# Altium PCB G-键盘板-V1.4.PcbDoc
Units mil, origin at the board's own origin, x right, y up, seen from the top; angles counter-clockwise.
Board outline 3543.31 x 4251.97 mil, 2 copper layers (Top Layer, Bottom Layer); 21 components, 10 nets, 74 pads, 6 vias.
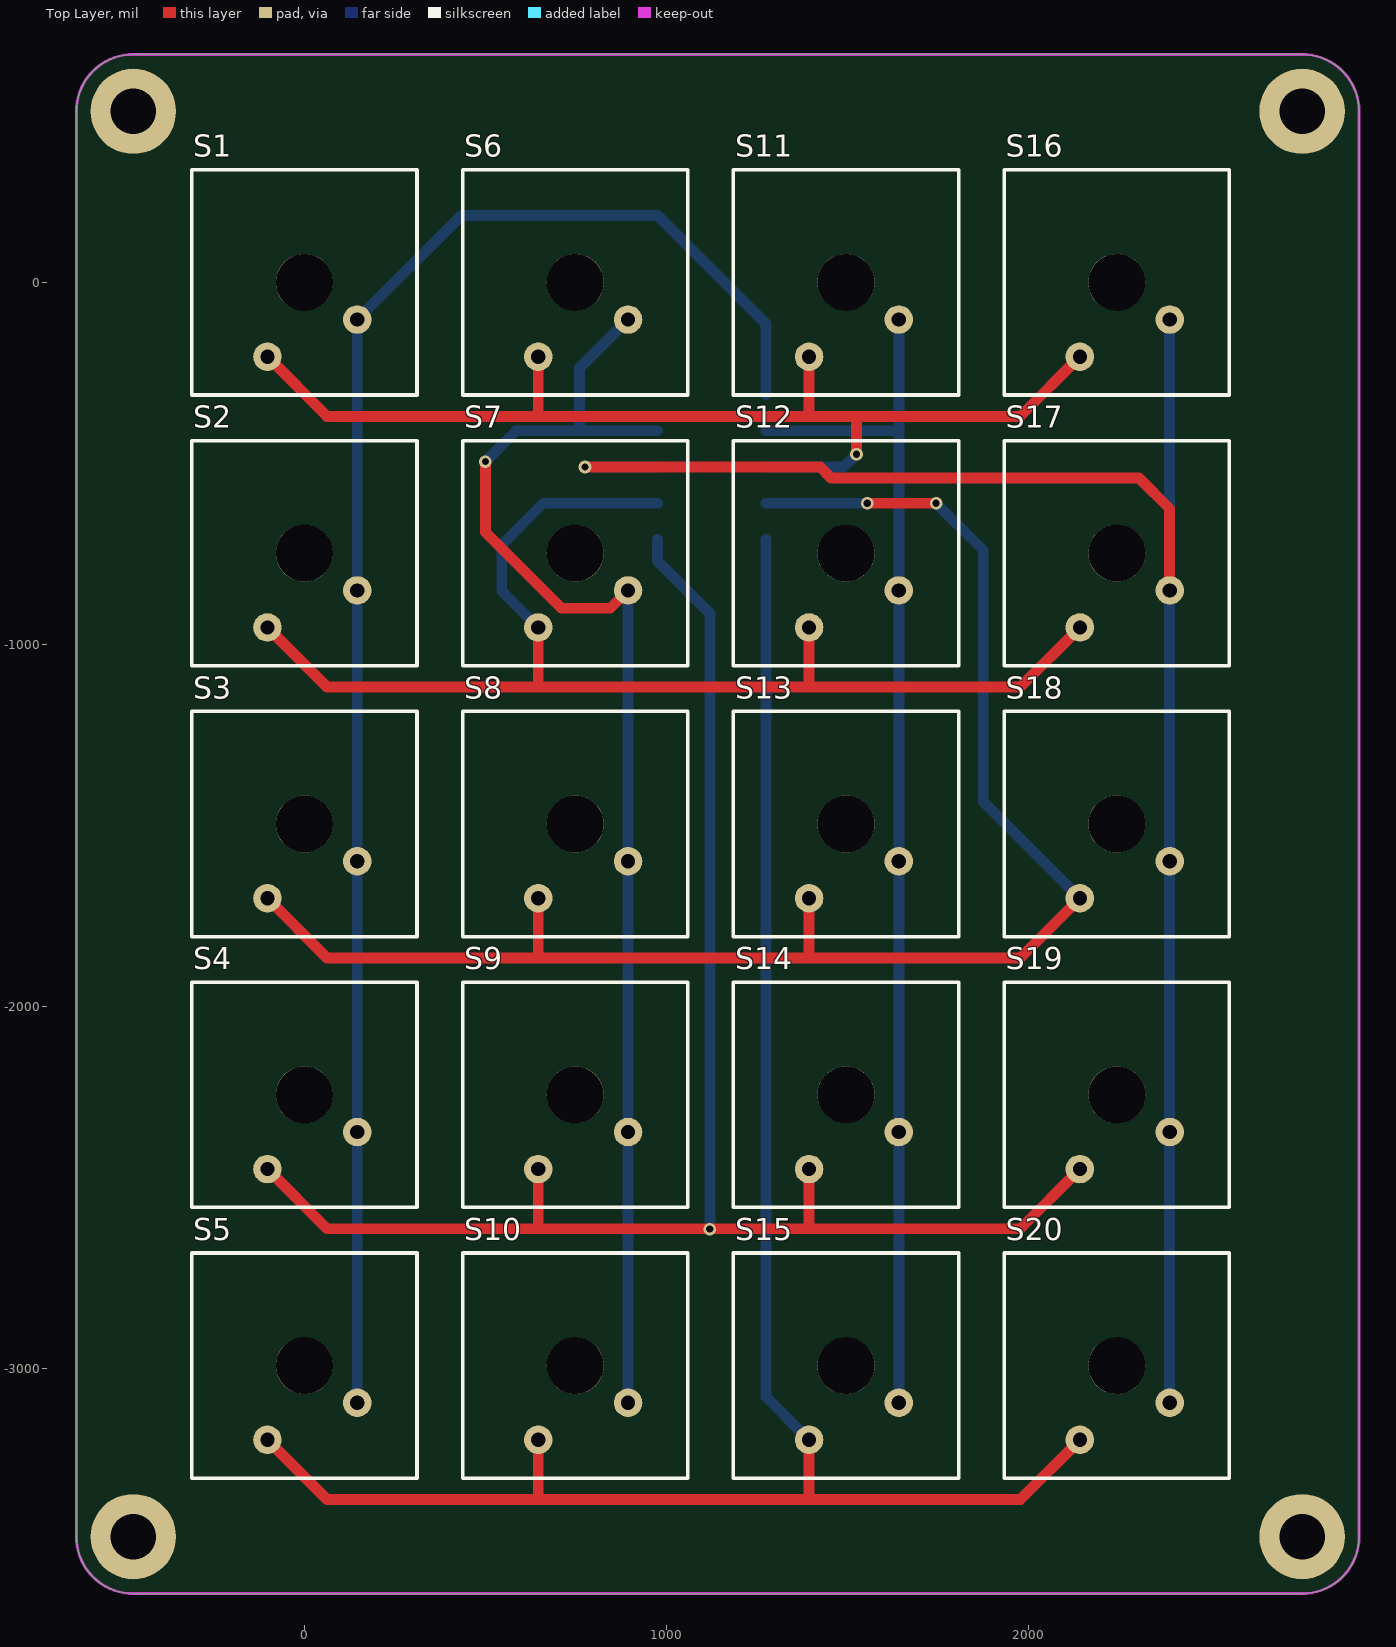
[diagram p0: Top Layer view]
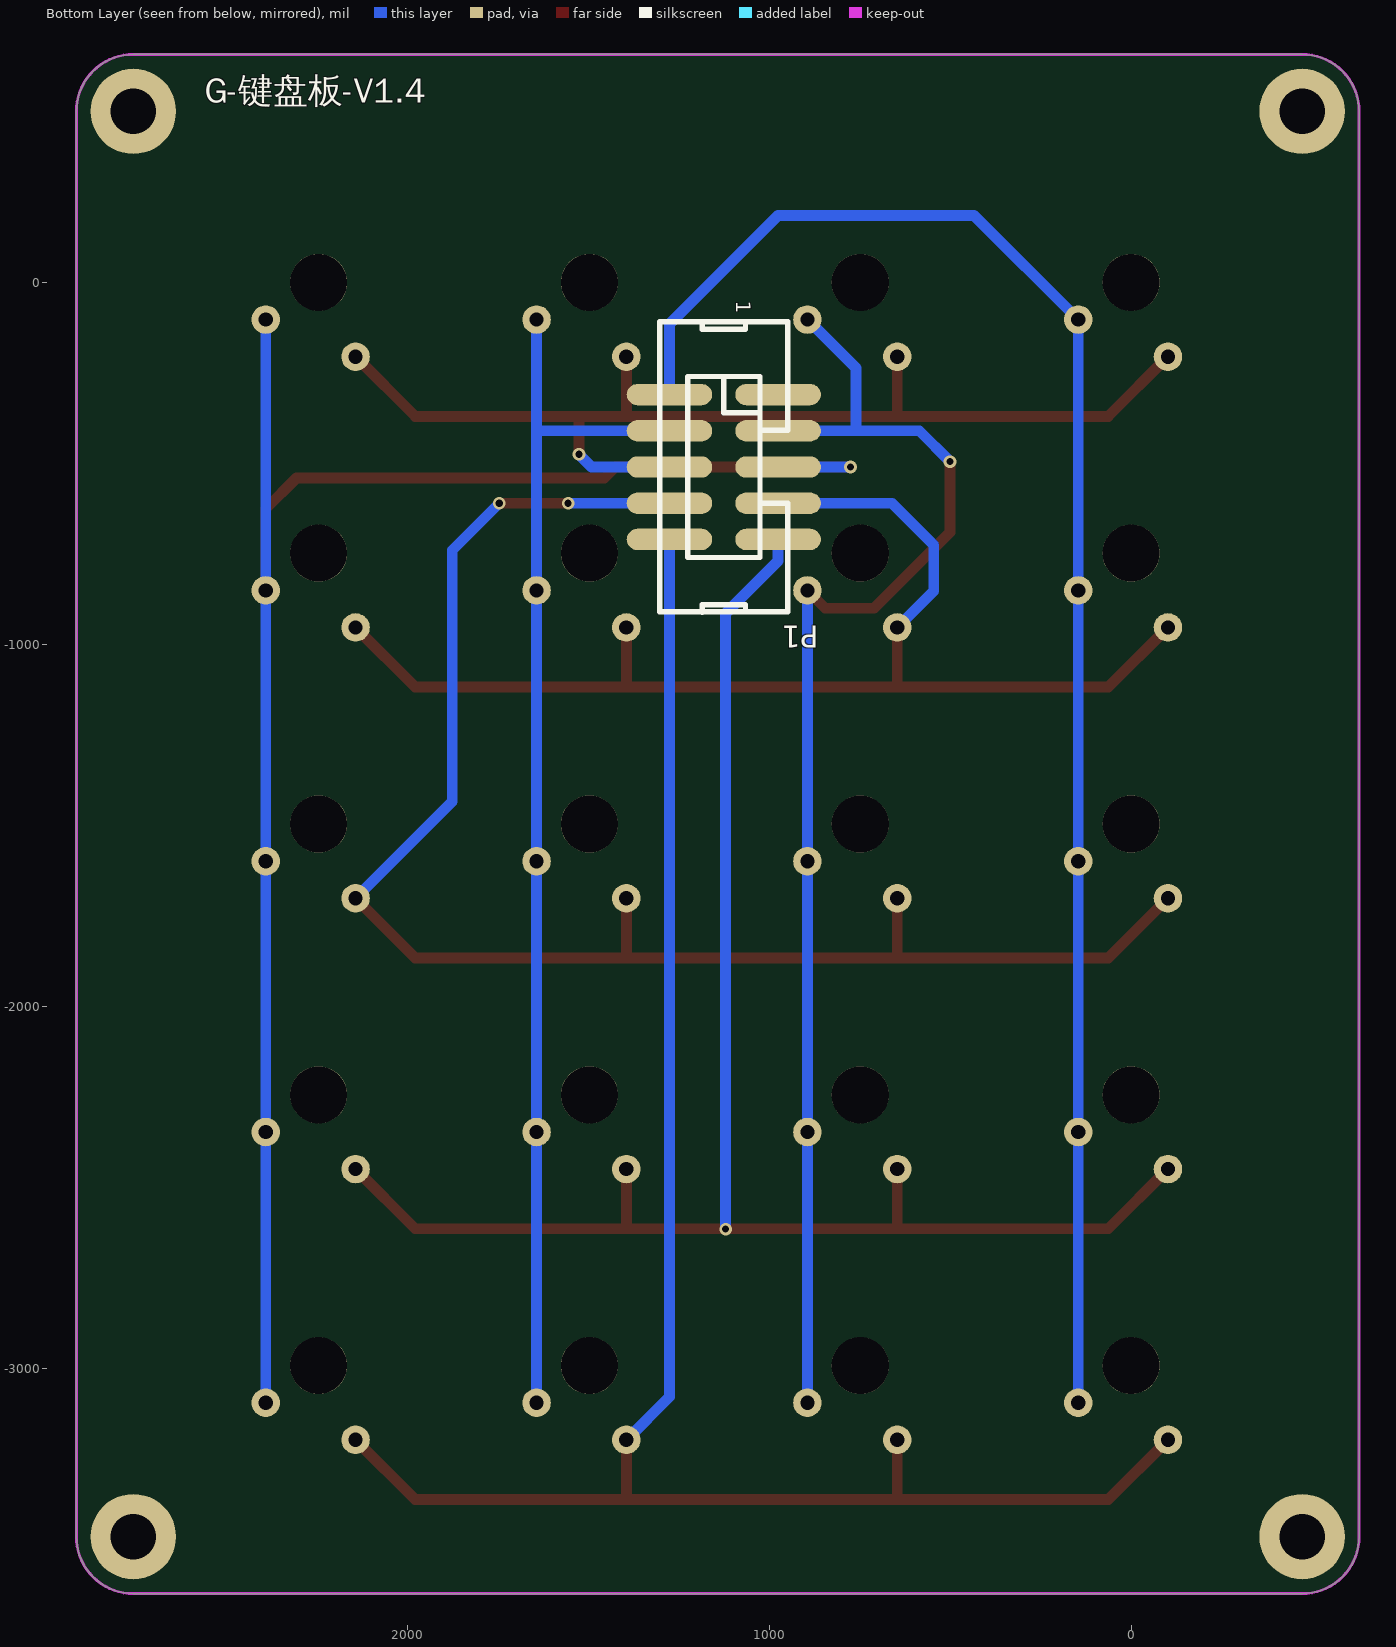
[diagram p1: Bottom Layer view, seen from below]

## Layer stack, top to bottom
Top Solder: solder mask 0.4, Solder Resist, Dk 3.5
Top Layer: signal copper 1.4
Dielectric 1: dielectric 12.6, FR-4, Dk 4.8
Bottom Layer: signal copper 1.4
Bottom Solder: solder mask 0.4, Solder Resist, Dk 3.5

## Board outline
-629.92,-3464.57 ccw(c-472.44,-3464.57) -472.44,-3622.05 2755.91,-3622.05 ccw(c2755.91,-3464.57) 2913.39,-3464.57 2913.39,472.44 ccw(c2755.91,472.44) 2755.91,629.92 -472.44,629.92 ccw(c-472.44,472.44) -629.92,472.44

## Design rules (kind name [scope] priority, off if disabled: settings)
Clearance [All] p1: gap=8 except(15: Arc-Poly Track-Poly SMDPad-Poly THPad-Poly Via-Poly Fill-Poly Poly-Poly)
PolygonConnect via [isvia] p1: connectstyle=Direct reliefconductorwidth=10 reliefentries=4 polygonreliefangle="90 Angle" airgapwidth=10
PolygonConnect [All] p2: connectstyle=Relief reliefconductorwidth=10 reliefentries=4 polygonreliefangle="90 Angle" airgapwidth=10
RoutingVias [All] p1: holewidth=11.81 width=23.62 viastyle="Through Hole" minholewidth=11.81 minwidth=23.62 maxholewidth=39.37 maxwidth=78.74
SolderMaskExpansion [All] p1: expansion=4
Width [All] p1: maxlimit=100 minlimit=10 preferedwidth=10
30 further rules are at their usual default settings.

## Components (designator, comment, footprint, x,y, rotation, side; value= is the part's Value field where it differs from the comment)
P1 "简易牛角座-10P" IDC2.54-SMD-10P 1075,-310 r270 bottom
S1 "BUTTON2" KEY 0,0 r0 top
S2 "BUTTON2" KEY 0,-748.03 r0 top
S3 "BUTTON2" KEY 0,-1496.06 r0 top
S4 "BUTTON2" KEY 0,-2244.09 r0 top
S5 "BUTTON2" KEY 0,-2992.13 r0 top
S6 "BUTTON2" KEY 748.03,0 r0 top
S7 "BUTTON2" KEY 748.03,-748.03 r0 top
S8 "BUTTON2" KEY 748.03,-1496.06 r0 top
S9 "BUTTON2" KEY 748.03,-2244.09 r0 top
S10 "BUTTON2" KEY 748.03,-2992.13 r0 top
S11 "BUTTON2" KEY 1496.06,0 r0 top
S12 "BUTTON2" KEY 1496.06,-748.03 r0 top
S13 "BUTTON2" KEY 1496.06,-1496.06 r0 top
S14 "BUTTON2" KEY 1496.06,-2244.09 r0 top
S15 "BUTTON2" KEY 1496.06,-2992.13 r0 top
S16 "BUTTON2" KEY 2244.09,0 r0 top
S17 "BUTTON2" KEY 2244.09,-748.03 r0 top
S18 "BUTTON2" KEY 2244.09,-1496.06 r0 top
S19 "BUTTON2" KEY 2244.09,-2244.09 r0 top
S20 "BUTTON2" KEY 2244.09,-2992.13 r0 top

## Footprints (in the part's own frame and the unit in brackets; to place one, negate y for a bottom-side part, rotate by r counter-clockwise, add the part's x,y. Pads: shape width x height; smd on the part's side, far side on the other; paste and mask are expansions set on the pad)
IDC2.54-SMD-10P [mm] "34P简易牛角座"
  oval 1.5x6 smd: 1(0,2.54) 2(0,-5.08) 3(2.54,2.54) 4(2.54,-5.08) 5(5.08,2.54) 6(5.08,-5.08) 7(7.62,2.54) 8(7.62,-5.08) 9(10.16,2.54) 10(10.16,-5.08)
  silkscreen extent -5.11,-5.77 15.27,3.23
KEY [mm]
  round 4 hole 4 unplated: 0(0,0)
  round 2 hole 1: 1(-2.591,-5.21) 2(3.709,-2.61)
  silkscreen extent -7.9,-7.9 7.9,7.9

## Part data
P1: library part DIC10, "连接器"
S1 S2 S3 S4 S5 S6 S7 S8 S9 S10 S11 S12 S13 S14 S15 S16 S17 S18 S19 S20: "按钮"

## Free pads (board coordinates)
  round 236.22 hole 125.98: 0(-472.44,472.44) 1(-472.44,-3464.57) 2(2755.91,-3464.57) 3(2755.91,472.44)

## Via types
v1: diameter 35, hole 20, Top Layer to Bottom Layer, tented both sides, 6 vias

## Nets (pads, with @x,y where several pads share a name; then routed paths per layer and width w, separated by ;. In a path a pad name is that pad's centre, name@x,y a point inside that pad or via, vN(x,y) a via of type N, cw(c..) or ccw(c..) an arc to the next point about the centre after c; other vN are vias at no path point)
PB0: P1.1
PB1: P1.3 S6.2 S7.2 S8.2 S9.2 S10.2 | length 3813.5
  Top Layer w30: v1(500,-495) 500,-690 710,-900 844.83,-900 S7.2
  Bottom Layer w30: v1(500,-495) 585,-410 815,-410 P1.3 ; 760,-410 760,-236.8 S6.2 ; S10.2 S9.2 S8.2 S7.2
PD9: P1.2 S1.2 S2.2 S3.2 S4.2 S5.2 | length 4559.6
  Bottom Layer w30: S5.2 S4.2 S3.2 S2.2 S1.2 433.77,185 975,185 1275,-115 P1.2
PD12: P1.8 S3.1 S8.1 S13.1 S18.1 | length 4429.2
  Top Layer w30: S3.1 62.88,-1866.06 1977.2,-1866.06 S18.1 ; 646.02,-1860.04 S8.1 ; 1394.06,-1865.12 S13.1 ; v1(1555,-610) v1(1745,-610)
  Bottom Layer w30: P1.8 v1(1555,-610) ; v1(1745,-610) 1875,-740 1875,-1434.09 S18.1
PD14: P1.10 S5.1 S10.1 S15.1 S20.1 | length 5240.1
  Top Layer w30: S5.1 62.88,-3362.13 1977.2,-3362.13 S20.1 ; 646.02,-3356.1 S10.1 ; 1394.06,-3361.18 S15.1
  Bottom Layer w30: P1.10 1275,-3078.18 S15.1
PF1: P1.6 S1.1 S6.1 S11.1 S16.1 | length 3073
  Top Layer w30: S1.1 62.88,-370 1525,-370 ; 646.02,-363.98 S6.1 ; 1394.06,-369.06 S11.1 ; v1(1525,-475) 1525,-370 ; S16.1 1977.2,-370 1525,-370
  Bottom Layer w30: P1.6 1490,-510 v1(1525,-475)
PF3: P1.4 S11.2 S12.2 S13.2 S14.2 S15.2 | length 3359.2
  Bottom Layer w30: P1.4 1642.09,-410 ; S15.2 S14.2 S13.2 S12.2 1642.09,-410 ; S11.2 1642.09,-410
PF11: P1.5 S16.2 S17.2 S18.2 S19.2 S20.2 | length 5080.6
  Top Layer w30: v1(775,-510) 1425,-510 1455,-540 2305,-540 2390.12,-625.12 S17.2
  Bottom Layer w30: v1(775,-510) P1.5 ; S20.2 S19.2 S18.2 S17.2 S16.2
PF12: P1.7 S2.1 S7.1 S12.1 S17.1 | length 3451.1
  Top Layer w30: S2.1 62.88,-1118.03 1977.2,-1118.03 S17.1 ; 646.02,-1112.01 S7.1 ; 1394.06,-1117.09 S12.1
  Bottom Layer w30: S7.1 545,-852.12 545,-725 660,-610 P1.7
PF13: P1.9 S4.1 S9.1 S14.1 S19.1 | length 4668.6
  Top Layer w30: S4.1 62.88,-2614.09 1977.2,-2614.09 S19.1 ; 646.02,-2608.07 S9.1 ; 1394.06,-2613.15 S14.1
  Bottom Layer w30: P1.9 975,-770 1120,-915 v1(1120,-2615)
pads on no net: S1.0 S2.0 S3.0 S4.0 S5.0 S6.0 S7.0 S8.0 S9.0 S10.0 S11.0 S12.0 S13.0 S14.0 S15.0 S16.0 S17.0 S18.0 S19.0 S20.0

## Keep-outs
Keep-Out Layer:
  the board outline again, w8

## Silkscreen, mask and mechanical layers (free items; w line width, h text height)
Bottom Overlay:
  text "G-键盘板-V1.4" at 2559.06,472.44 h120

## Text inside footprints (layer, text, board x,y; h text height)
P1: Bottom Overlay "1" at 1090.75,-50.16 h40 r90